# Altium PCB Electromagnetic Op-Amp Board.PcbDoc
Units mm, origin at the board's own origin, x right, y up, seen from the top; angles counter-clockwise.
Board outline 37.21 x 32.89 mm, 2 copper layers (Top Layer, Bottom Layer); 39 components, 30 nets, 106 pads, 19 vias.
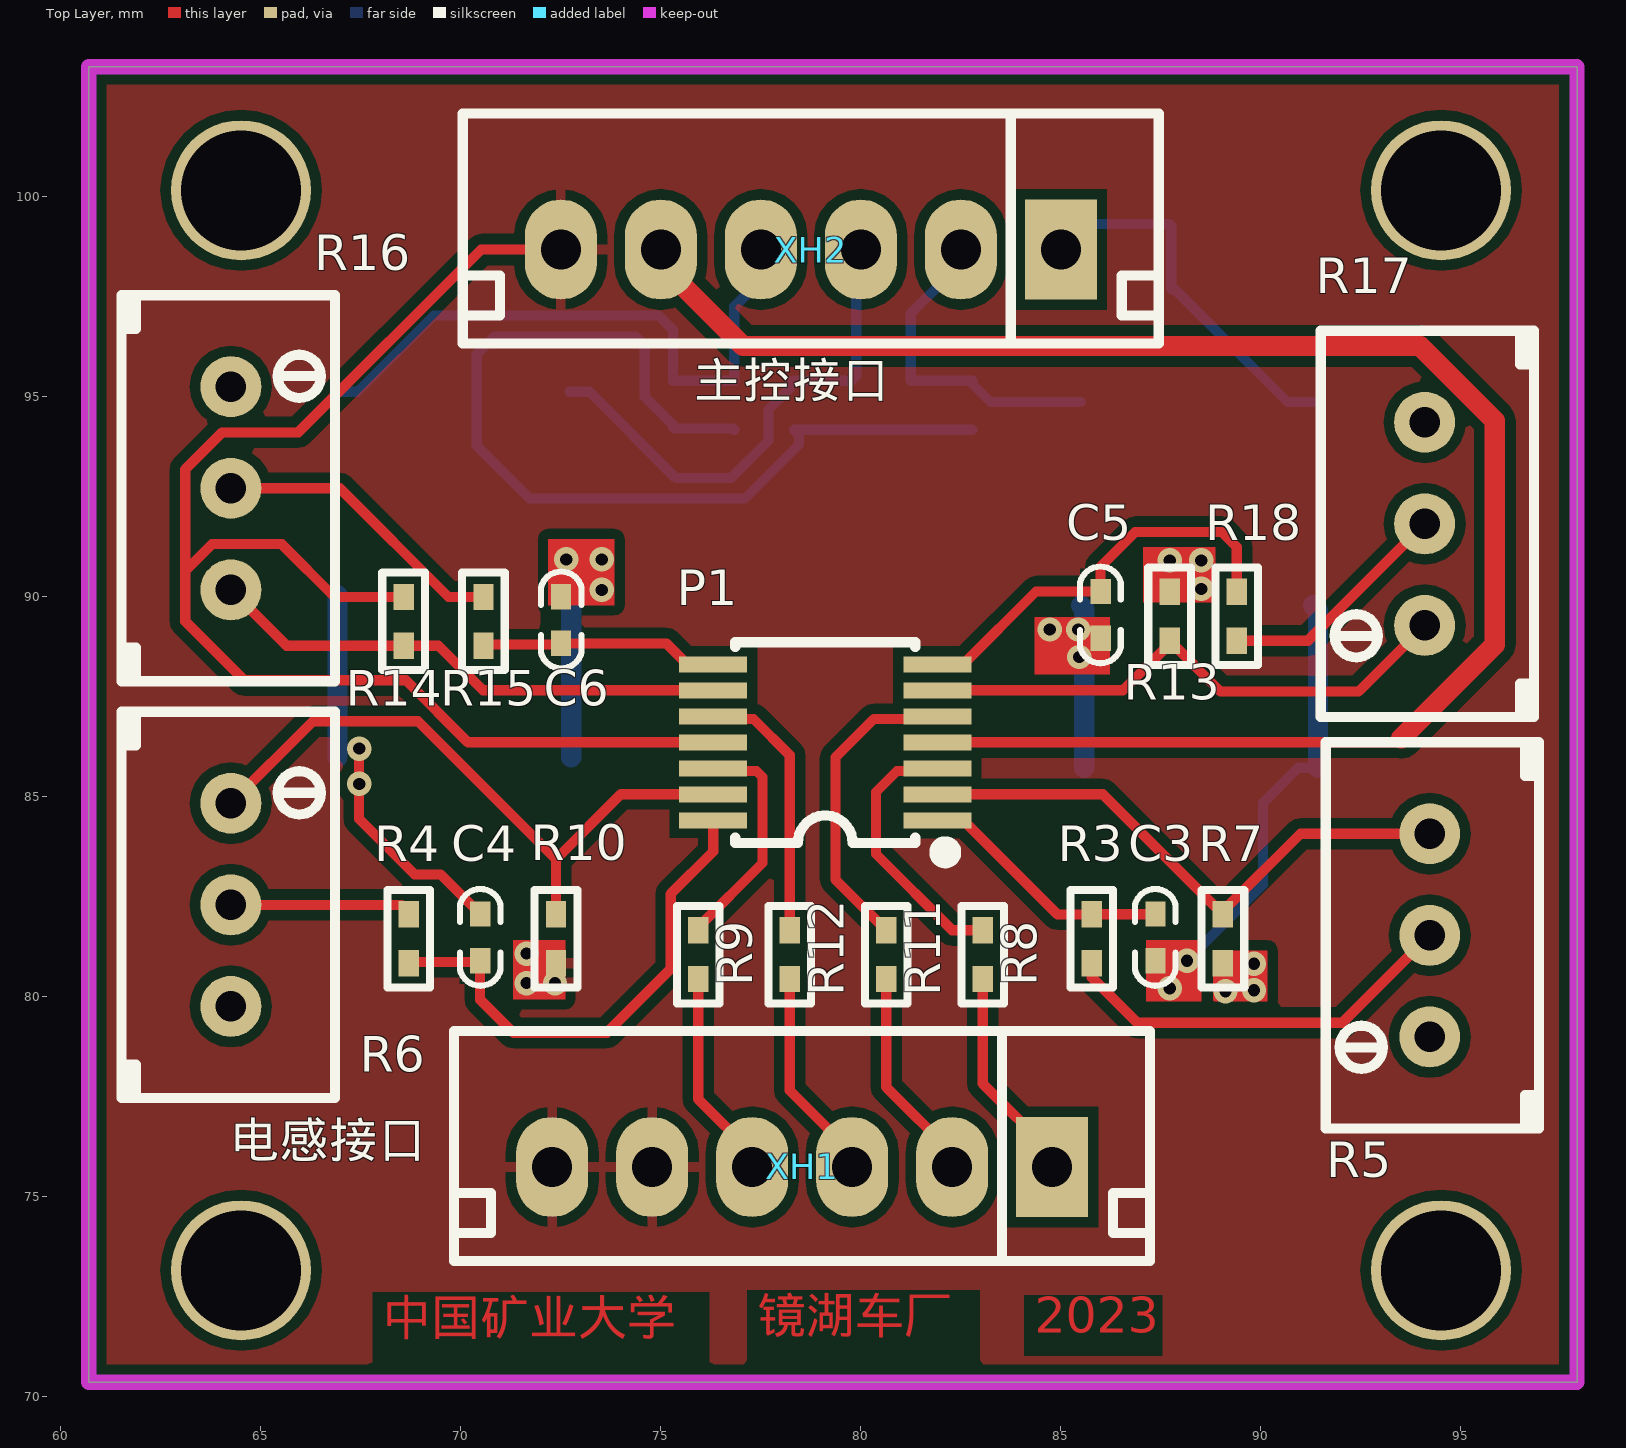
[diagram p0: Top Layer view]
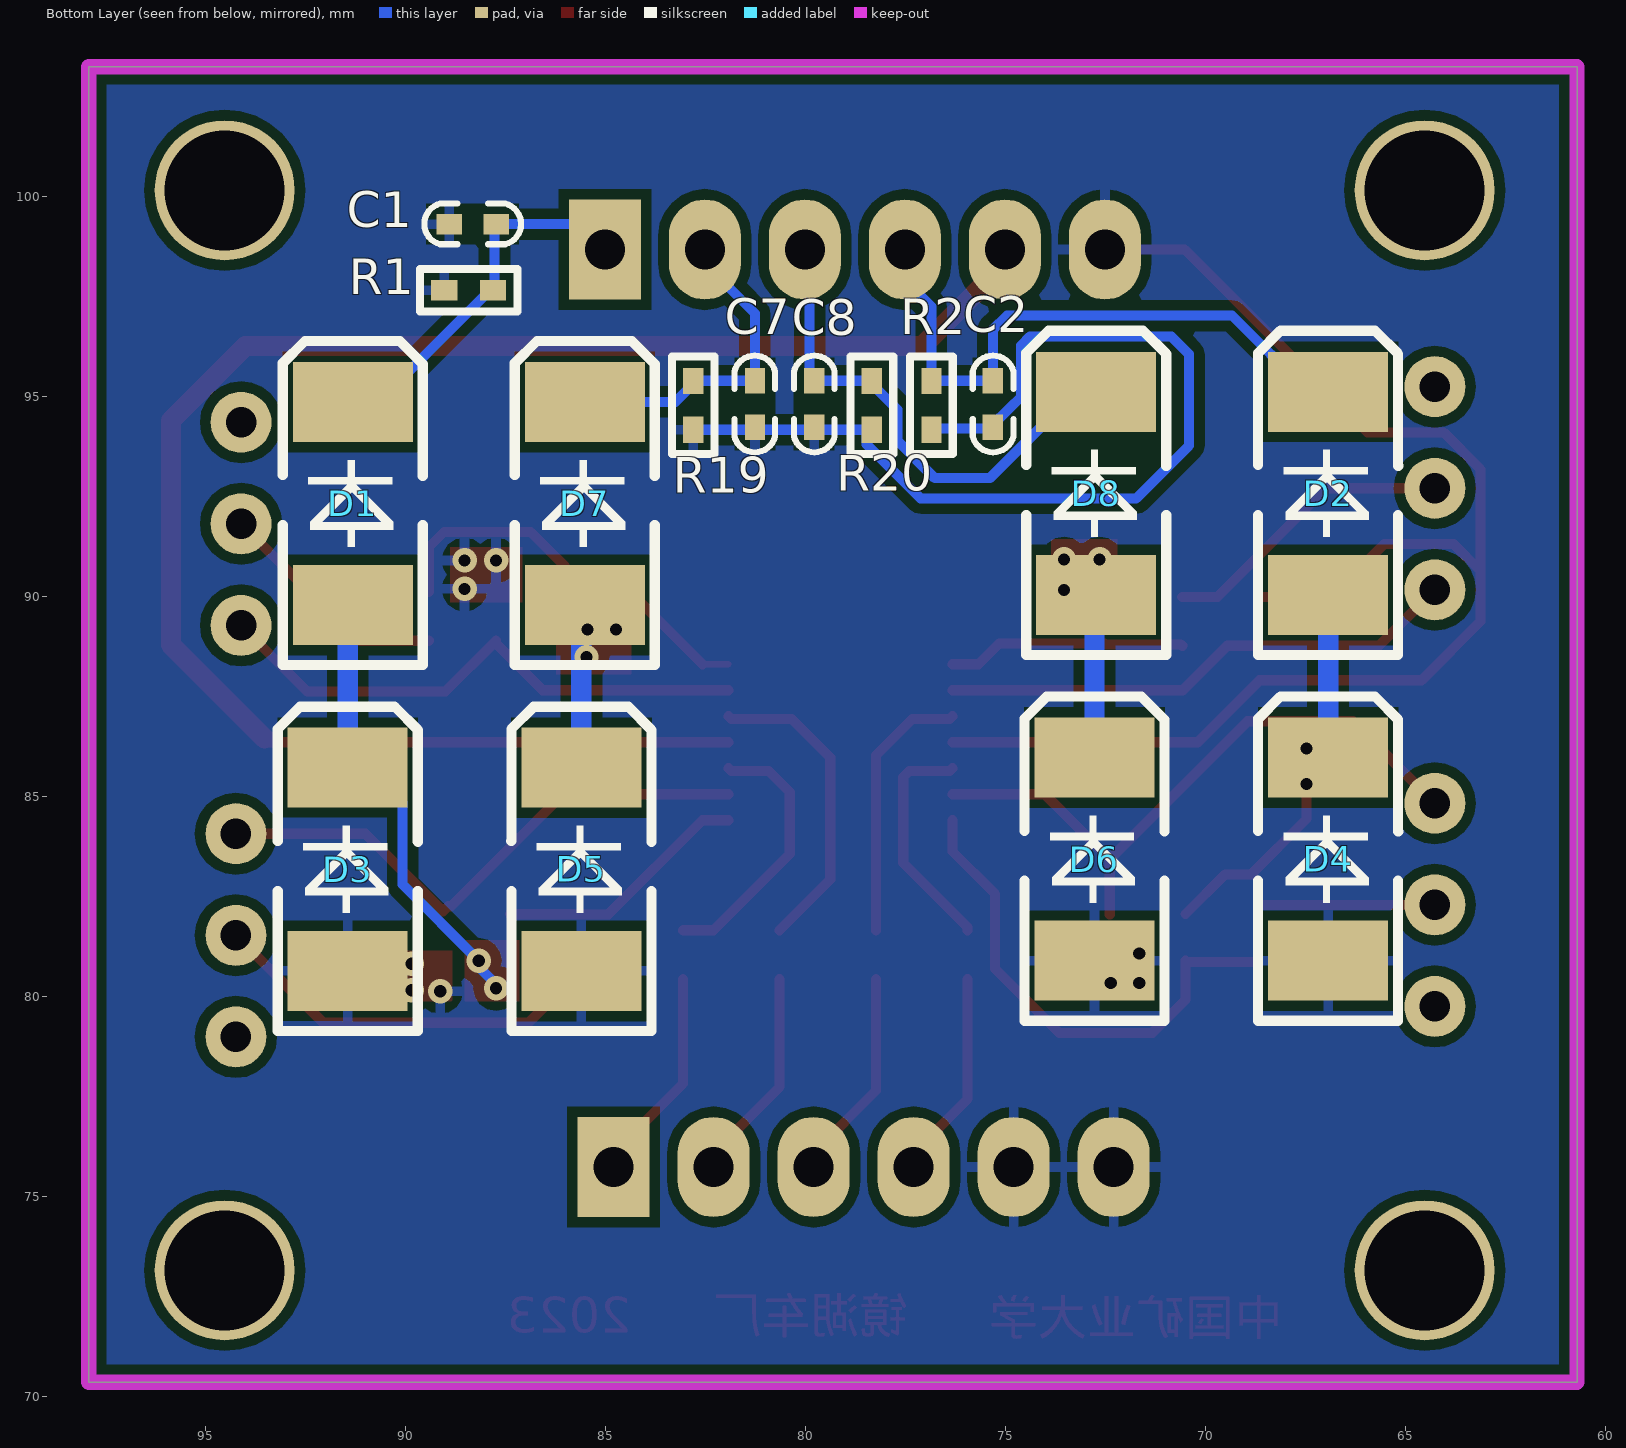
[diagram p1: Bottom Layer view, seen from below]
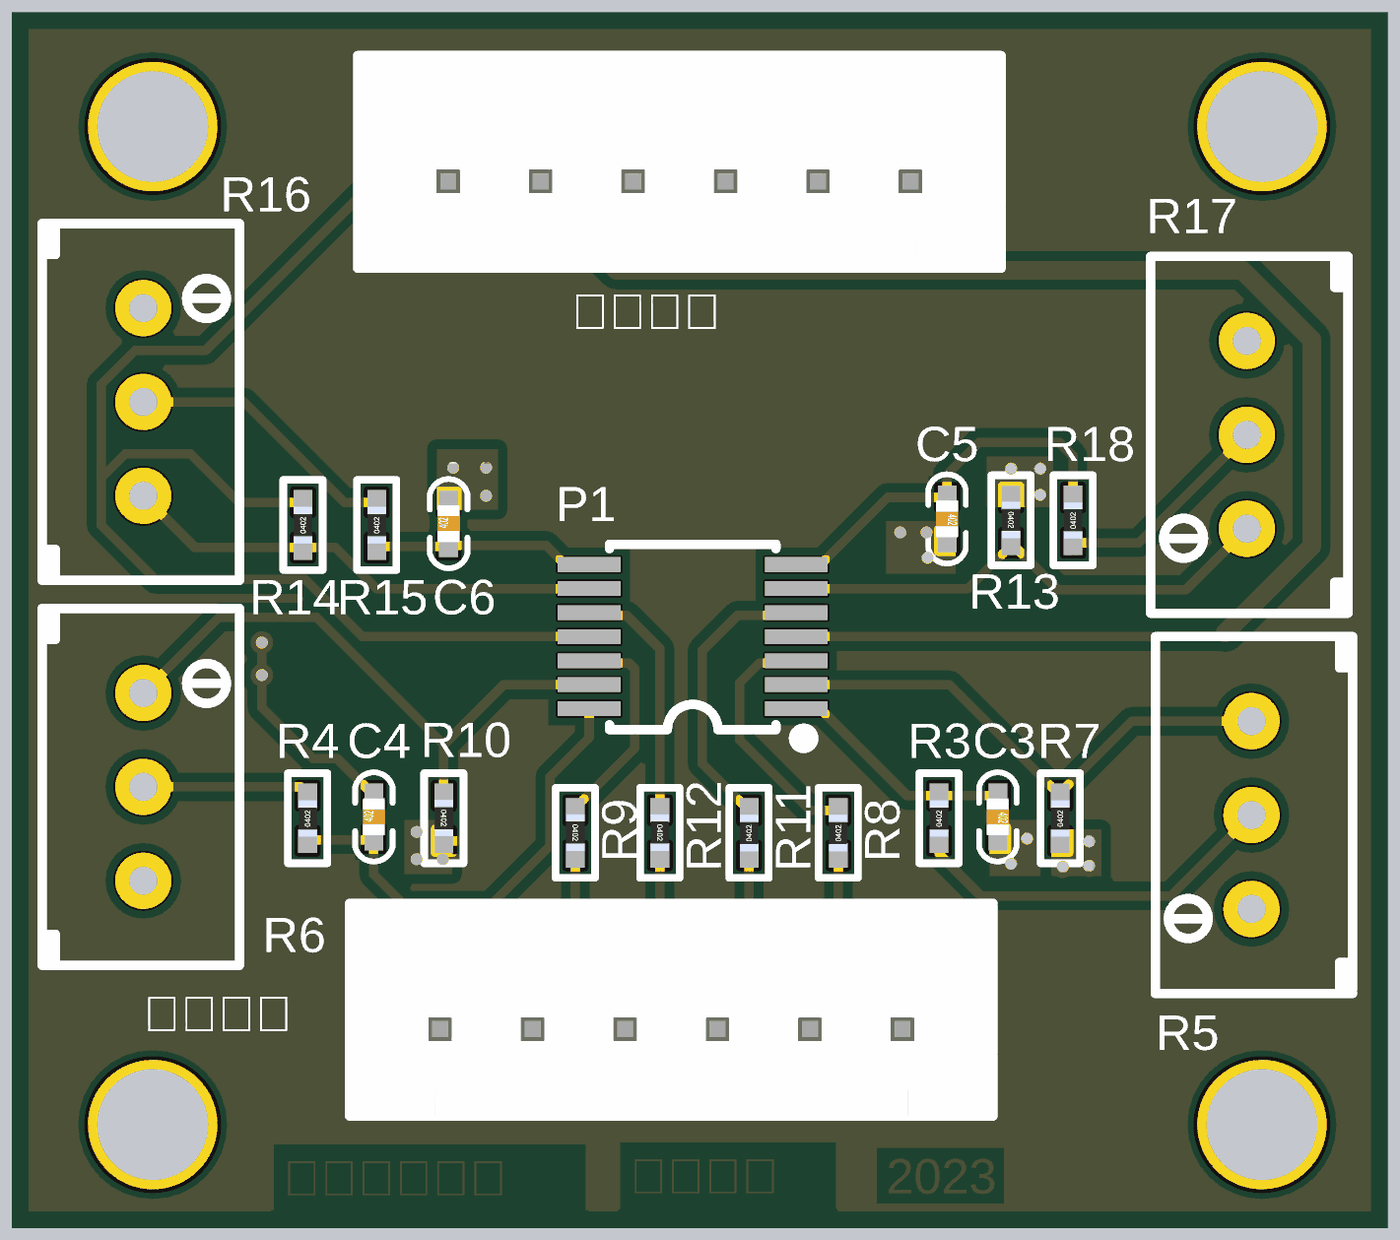
[diagram p2: 3D render of the assembled board from above, using the file's embedded part models]
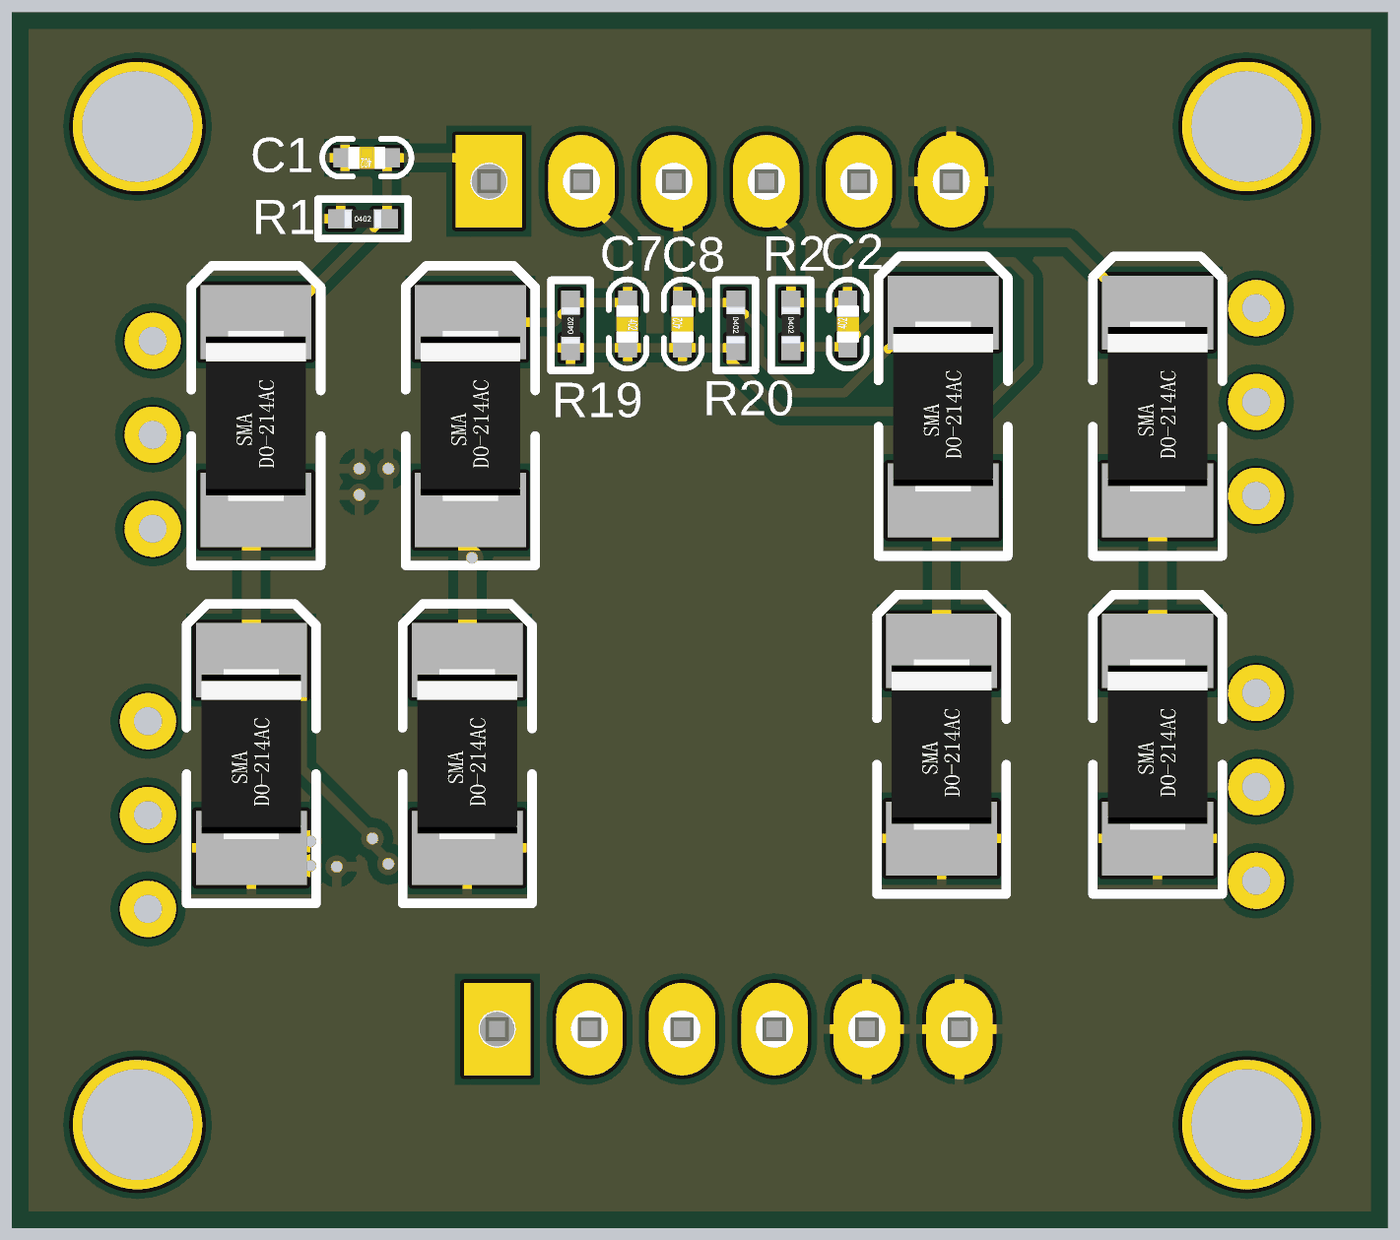
[diagram p3: 3D render of the assembled board from below, using the file's embedded part models]

## Layer stack, top to bottom
Top Solder: solder mask 0.0102, Solder Resist, Dk 3.5
Top Layer: signal copper 0.0356
Dielectric 1: dielectric 0.32, FR-4, Dk 4.8
Bottom Layer: signal copper 0.0356
Bottom Solder: solder mask 0.0102, Solder Resist, Dk 3.5

## Board outline
60.706,70.358 97.917,70.358 97.917,103.251 60.706,103.251

## Design rules (kind name [scope] priority, off if disabled: settings)
Clearance [All] p1: gap=0.254 ignorepadtopadclearanceinfootprint=FALSE except(0: Arc-Hole Track-Hole SMDPad-Hole THPad-Hole Via-Hole Fill-Hole Poly-Hole Region-Hole Text-Hole)
HoleToHoleClearance [All] p1: gap=0 allowstackedmicrovias=TRUE
MinimumSolderMaskSliver [All] p1: minsoldermaskwidth=0
PolygonConnect [All] p1: connectstyle=Relief reliefconductorwidth=0.254 reliefentries=4 polygonreliefangle="90 Angle" airgapwidth=0.254
RoutingVias [All] p1: holewidth=0.61 width=0.305 viastyle="Through Hole" minholewidth=0 minwidth=0 maxholewidth=20 maxwidth=20
SilkToSilkClearance [All] p1: silktosilkclearance=0
SilkToSolderMaskClearance [IsPad] p1: minsilkscreentomaskgap=0 clearancetoexposedcopper=TRUE
SolderMaskExpansion [All] p1: expansion=0.102
Width [All] p1: maxlimit=2.54 minlimit=0.152 preferedwidth=0.254 minimp=50.000000 maximp=50.000000 favimp=50.000000
26 further rules are at their usual default settings.

## Components (designator, comment, footprint, x,y, rotation, side; value= is the part's Value field where it differs from the comment)
C1 "0.1uF" 0402C 87.681,99.318 r0 bottom
C2 "0.1uF" 0402C 75.307,94.183 r90 bottom
C3 "0.1uF" 0402C 87.372,82.118 r270 top
C4 "0.1uF" 0402C 70.498,80.848 r90 top
C5 "0.1uF" 0402C 86.001,90.18 r270 top
C6 "0.1uF" 0402C 72.521,88.783 r90 top
C7 "0.1uF" 0402C 81.264,95.453 r270 bottom
C8 "0.1uF" 0402C 79.775,94.183 r90 bottom
D1 "SS54" SMA/DO-214AC 91.313,89.916 r90 bottom
D2 "SS54" SMA/DO-214AC 66.929,90.17 r90 bottom
D3 "SS54" SMA/DO-214AC 91.44,80.772 r90 bottom
D4 "SS54" SMA/DO-214AC 66.929,81.026 r90 bottom
D5 "SS54" SMA/DO-214AC 85.598,80.772 r90 bottom
D6 "SS54" SMA/DO-214AC 72.771,81.026 r90 bottom
D7 "SS54" SMA/DO-214AC 85.513,89.916 r90 bottom
D8 "SS54" SMA/DO-214AC 72.729,90.17 r90 bottom
P1 "OPA4377AIPWR" OPA4377AIPWR 79.121,86.36 r90 top
R1 "47k" 0402R 89.027,97.663 r180 bottom
R2 "47k" 0402R 76.847,95.393 r270 bottom
R3 "47k" 0402R 85.783,80.839 r90 top
R4 "47k" 0402R 68.707,80.839 r90 top
R5 "可调电阻100k" 可调电阻100k 94.234,81.534 r180 top value=100kΩ
R6 "可调电阻100k" 可调电阻100k 64.262,82.296 r0 top value=100kΩ
R7 "1k" 0402R 89.062,80.839 r90 top
R8 "5.1k" 0402R 83.058,80.442 r90 top
R9 "5.1k" 0402R 75.946,81.661 r270 top
R10 "1k" 0402R 72.39,82.058 r270 top
R11 "5.1k" 0402R 80.645,80.442 r90 top
R12 "5.1k" 0402R 78.232,81.661 r270 top
R13 "1k" 0402R 87.73,90.119 r270 top
R14 "1k" 0402R 68.58,88.773 r90 top
R15 "47k" 0402R 70.576,88.773 r90 top
R16 "可调电阻100k" 可调电阻100k 64.262,92.71 r0 top value=100kΩ
R17 "可调电阻100k" 可调电阻100k 94.107,91.821 r180 top value=100kΩ
R18 "47k" 0402R 89.408,88.9 r90 top
R19 "47k" 0402R 82.804,94.174 r90 bottom
R20 "47k" 0402R 78.336,95.393 r270 bottom
XH1 "电感接口" XH6/2.54mm/180 84.792,75.743 r180 top
XH2 "主控接口" XH6/2.54mm/180 85.01,98.679 r180 top

## Footprints (in the part's own frame and the unit in brackets; to place one, negate y for a bottom-side part, rotate by r counter-clockwise, add the part's x,y. Pads: shape width x height; smd on the part's side, far side on the other; paste and mask are expansions set on the pad)
0402C [mil]
  rect 25x20 smd: 1(2,0.16) 2(48,0.16)
  silkscreen extent -23,-20 73,20, body extent 5,-12 45,12, height 8
0402R [mil]
  rect 26x20 smd: 1(0,0) 2(48,0)
  silkscreen extent -24,-21 72,21, body extent 4,-10 43,10, height 13
OPA4377AIPWR [mm]
  rect 0.4x1.7 smd mask+0.051: 1(-1.95,-2.8) 2(-1.3,-2.8) 3(-0.65,-2.8) 4(0,-2.8) 5(0.65,-2.8) 6(1.3,-2.8) 7(1.95,-2.8) 8(1.95,2.8) 9(1.3,2.8) 10(0.65,2.8) 11(0,2.8) 12(-0.65,2.8) 13(-1.3,2.8) 14(-1.95,2.8)
  silkscreen extent -2.95,-3.2 2.5,2.25
SMA/DO-214AC [mm] "塑封二极管"
  rect 2x3 smd: A(-0.127,0) K(4.953,0)
  silkscreen extent -1.63,-1.75 6.48,1.75, body extent 0.11,-1.35 4.71,1.35, height 2.4
XH6/2.54mm/180 [mm]
  rect 1.8x2.5 hole 1: 1(0,0)
  oval 1.8x2.5 hole 1: 2(2.5,0) 3(5,0) 4(7.5,0) 5(10,0) 6(12.5,0)
  silkscreen extent -2.45,-3.4 14.95,2.35, body extent -2.45,-3.4 14.95,2.35, height 7
可调电阻100k [mil]
  round 60 hole 30 mask+2: 1(0,99.99) 2(0,-0.01) 3(0,-100.01)
  silkscreen extent -108,-190 102,190

## Part data
C1 C2 C3 C4 C5 C6 C7 C8: library part CAP, "无极性电容"
D1 D2 D3 D4 D5 D6 D7 D8: library part "DIODE SCHOTTKY", "肖特基二极管"
P1: "Header, 7-Pin, Dual row", LatestRevisionDate=17-Jul-2002, LatestRevisionNote="Re-released for DXP Platform.", Publisher="Altium Limited"
R1 R2 R3 R4 R7 R8 R9 R10 R11 R12 R13 R14 R15 R18 R19 R20: library part RES
R5 R6 R16 R17: JLCPCB Part Class="Extended Part", LCSC Part Name="100kΩ ±1", Manufacturer=BOURNS, Manufacturer Part=3296W-1-104LF, Tolerance=±10%, Add into BOM=yes, Convert to PCB=yes, Datasheet=https://atta.szlcsc.com/upload/public/pdf/source/20150811/1457707339453.pdf, Device=3296W-1-104LF, Name=100kΩ, Supplier=LCSC, Supplier Footprint=插?, Supplier Part=C48084, Symbol=3296W-1-104LF
XH1 XH2: library part XH6

## Free pads (board coordinates)
  round 3.5 hole 3: 9(64.516,100.16) 10(94.516,100.16) 11(64.516,73.16) 12(94.516,73.16)

## Via types
v1: diameter 0.61, hole 0.305, Top Layer to Bottom Layer, tented both sides, 19 vias

## Nets (pads, with @x,y where several pads share a name; then routed paths per layer and width w, separated by ;. In a path a pad name is that pad's centre, name@x,y a point inside that pad or via, vN(x,y) a via of type N, cw(c..) or ccw(c..) an arc to the next point about the centre after c; other vN are vias at no path point)
A3V3: P1.4 XH2.5 | length 43.4
  Top Layer w0.254: P1.4 93.421,86.36 93.523,86.462
  Top Layer w0.508: XH2.5 75.01,98.329 77.073,96.266 93.998,96.266 95.86,94.404 95.86,88.798 93.523,86.462
AGND: C1.2 C2.1 C7.2 C8.1 D3.A D4.A D5.A D6.A P1.11 R1.1 R2.2 R7.1 R10.2 R13.1 R14.2 R19.1 R20.2 XH1.5 XH1.6 XH2.6 | length 60.9
  Top Layer w0.254: R14.2 66.853,89.992 65.532,91.313 63.789,91.313 63.119,90.643 ; XH2.6 70.518,98.679 65.946,94.107 64.043,94.107 63.119,93.183 63.119,90.643 ; P1.11 70.187,86.36 68.638,87.909 64.592,87.909 63.119,89.382 63.119,90.643
  Bottom Layer w0.254: R2.2 76.817,94.204 75.341,94.204 C2.1 75.311,94.297 74.905,94.704 74.899,94.704 74.61,94.993 74.61,96.281 74.386,96.504 70.85,96.504 70.409,96.063 70.409,93.777 71.73,92.456 77.114,92.456 78.463,93.805 78.463,94.047 R20.2 81.26,94.174 R19.1
  other v1: 89.129,80.137 89.84,80.162 71.653,80.34 72.365,80.34 89.84,80.823 71.653,81.077 88.519,90.195 87.732,90.907 88.519,90.907
IN1: R8.1 XH1.1 | length 5.4
  Top Layer w0.254: R8.1 83.058,77.827 84.792,76.093 XH1.1
IN2: R11.1 XH1.2 | length 5.4
  Top Layer w0.254: R11.1 80.645,77.74 82.292,76.093 XH1.2
IN3: R12.2 XH1.3 | length 5.3
  Top Layer w0.254: R12.2 78.232,77.653 79.792,76.093 XH1.3
IN4: R9.2 XH1.4 | length 5.3
  Top Layer w0.254: R9.2 75.946,77.439 77.292,76.093 XH1.4
NetC3_1: C3.1 P1.1 R3.2 | length 6.4
  Top Layer w0.254: P1.1 82.571,84.41 84.923,82.058 R3.2 85.788,82.063 87.371,82.063 C3.1
NetC3_2: C3.2 D1.A D3.K | length 11.5
  Bottom Layer w0.254: v1(87.732,80.213) 87.732,80.309 88.095,80.673 88.095,80.831 v1(88.163,80.899) 90.067,82.803 90.067,84.852 90.94,85.725 D3.K
  Bottom Layer w0.508: D1.A 91.44,89.662 D3.K
NetC4_1: C4.1 P1.14 R4.1 | length 12.7
  Top Layer w0.254: R4.1 68.737,80.869 70.464,80.869 C4.1 70.494,79.925 71.323,79.096 73.66,79.096 75.26,80.696 75.26,82.57 76.321,83.631 P1.14
NetC4_2: C4.2 D2.A D4.K | length 9.9
  Top Layer w0.254: v1@67.437,86.233 v1(67.469,86.201) v1(67.469,85.321) 67.469,84.44 68.851,83.058 69.503,83.058 C4.2
  Bottom Layer w0.508: D4.K D2.A
NetC5_1: C5.1 P1.7 R18.2 | length 10.5
  Top Layer w0.152: P1.7 P1.7@82.571,88.31
  Top Layer w0.254: P1.7@82.571,88.31 84.39,90.129 C5.1 86.005,90.755 86.868,91.618 89.032,91.618 89.408,91.242 R18.2
NetC5_2: C5.2 D5.K D7.A | length 4.1
  Bottom Layer w0.508: D7.A 85.598,89.704 D5.K
  other v1: 85.471,88.494 84.734,89.179 85.446,89.179
NetC6_1: C6.1 P1.8 R15.1 | length 6
  Top Layer w0.254: R15.1 70.606,88.803 72.487,88.803 C6.1 75.147,88.833 75.671,88.31 P1.8
NetC6_2: C6.2 D6.K D8.A | length 4.1
  Bottom Layer w0.508: D8.A 72.771,90.001 D6.K
  other v1: 73.533,90.17 72.644,90.932 73.533,90.932
NetP1_2: P1.2 R5.3 R7.2 | length 14.3
  Top Layer w0.254: P1.2 86.06,85.06 88.859,82.261 88.935,82.261 89.062,82.134 91.002,84.074 R5.3
NetP1_3: P1.3 R8.2 | length 6.8
  Top Layer w0.254: P1.3 81.852,85.641 80.913,85.641 80.391,85.119 80.391,83.566 82.296,81.661 R8.2
NetP1_5: P1.5 R11.2 | length 7.8
  Top Layer w0.254: R11.2 79.375,82.931 79.375,85.979 80.337,86.941 81.852,86.941 P1.5
NetP1_6: P1.6 R13.2 R17.1 | length 14
  Top Layer w0.254: P1.6 86.566,87.66 87.73,88.824 R13.2 89,87.63 92.456,87.63 R17.1
NetP1_9: P1.9 R14.1 R16.3 | length 13.1
  Top Layer w0.254: R16.3 65.659,88.773 R14.1 69.453,88.773 70.566,87.66 P1.9
NetP1_10: P1.10 R12.1 | length 6.7
  Top Layer w0.254: P1.10 76.39,86.941 77.329,86.941 78.232,86.038 R12.1
NetP1_12: P1.12 R9.1 | length 5.8
  Top Layer w0.254: R9.1 75.946,81.737 77.552,83.343 77.552,85.492 77.403,85.641 76.39,85.641 P1.12
NetP1_13: P1.13 R6.1 R10.1 | length 16.4
  Top Layer w0.254: R6.1 66.313,86.887 68.942,86.887 72.39,83.439 ; R10.1 72.39,83.439 ; P1.13 74.011,85.06 72.39,83.439
NetR3_1: R3.1 R5.2 | length 10.2
  Top Layer w0.254: R3.1 85.783,80.485 86.919,79.35 92.049,79.35 R5.2
NetR4_2: R4.2 R6.2 | length 4.6
  Top Layer w0.152: R4.2@68.529,82.296 68.707,82.118 R4.2
  Top Layer w0.254: R6.2 R4.2@68.529,82.296
NetR15_2: R15.2 R16.2 | length 7.4
  Top Layer w0.254: R16.2 66.985,92.71 69.703,89.992 R15.2
NetR17_2: R17.2 R18.1 | length 5.9
  Top Layer w0.254: R18.1 91.186,88.9 R17.2
OUT1: C1.1 D1.K R1.2 XH2.1 | length 9.3
  Bottom Layer w0.254: XH2.1 85.645,99.314 C1.1 87.77,99.276 87.77,97.701 R1.2 87.884,97.663 90.678,94.869 D1.K
OUT2: C7.1 D7.K R19.2 XH2.2 | length 8.3
  Bottom Layer w0.254: XH2.2 82.51,98.329 81.26,97.079 C7.1 81.265,95.398 82.799,95.398 R19.2 82.804,95.317 83.252,94.869 D7.K
OUT3: C8.2 D8.K R20.1 XH2.3 | length 12.8
  Bottom Layer w0.254: D8.K 73.229,95.123 75.388,92.964 76.76,92.964 77.701,93.905 77.701,94.682 78.232,95.212 R20.1@78.232,95.377 ; R20.1 78.341,95.398 79.774,95.398 C8.2 79.894,95.518 79.894,98.563 XH2.3
OUT4: C2.2 D2.K R2.1 XH2.4 | length 15.7
  Bottom Layer w0.254: D2.K 67.429,95.123 69.334,97.028 74.955,97.028 75.311,96.672 C2.2 75.316,95.398 76.842,95.398 R2.1 76.847,97.248 77.51,97.911 XH2.4
pads on no net: R5.1 R6.3 R16.1 R17.3

## Polygon pours and split planes (outlines as drawn)
no net on Top Overlay (solid): 59.665,103.759
AGND on Bottom Layer "Bottom Layer-AGND" (solid, remove dead copper, pour order 4): 60.1,104.377 60.354,104.123 98.683,104.123 98.683,70.189 98.632,70.138 98.479,70.291 59.948,70.291
AGND on Top Layer "Top Layer-AGND" (solid, remove dead copper, pour order 6): 60.566,103.34 98.082,103.34 98.132,103.289 97.878,103.035 97.878,70.447 60.464,70.447 60.413,70.396

## Keep-outs
Keep-Out Layer:
  the board outline again, w0.381

## Other copper
Top Layer:
  region net AGND: 88.824,81.153 90.17,81.153 90.17,79.883 88.849,79.883 88.824,79.908
  region net AGND: 71.323,81.407 71.323,79.934 72.619,79.934 72.619,81.407
  region net AGND: 87.071,91.237 87.071,89.865 88.875,89.865 88.875,91.237
  region net NetC3_2: 87.147,81.407 88.519,81.407 88.519,79.883 87.147,79.883
  region net NetC5_2: 86.233,89.484 84.353,89.484 84.353,88.062 86.233,88.062
  region: 86.233,89.281
  region net NetC6_2: 72.2,91.44 72.2,89.789 73.85,89.789 73.85,91.44
  text "镜湖车厂" at 77.419,71.298 h1.52
  text "2023" at 84.353,71.298 h1.52
  text "中国矿业大学" at 68.047,71.247 h1.52